# EAGLE board underground_cable_fault_finder (EAGLE 7.1.0)
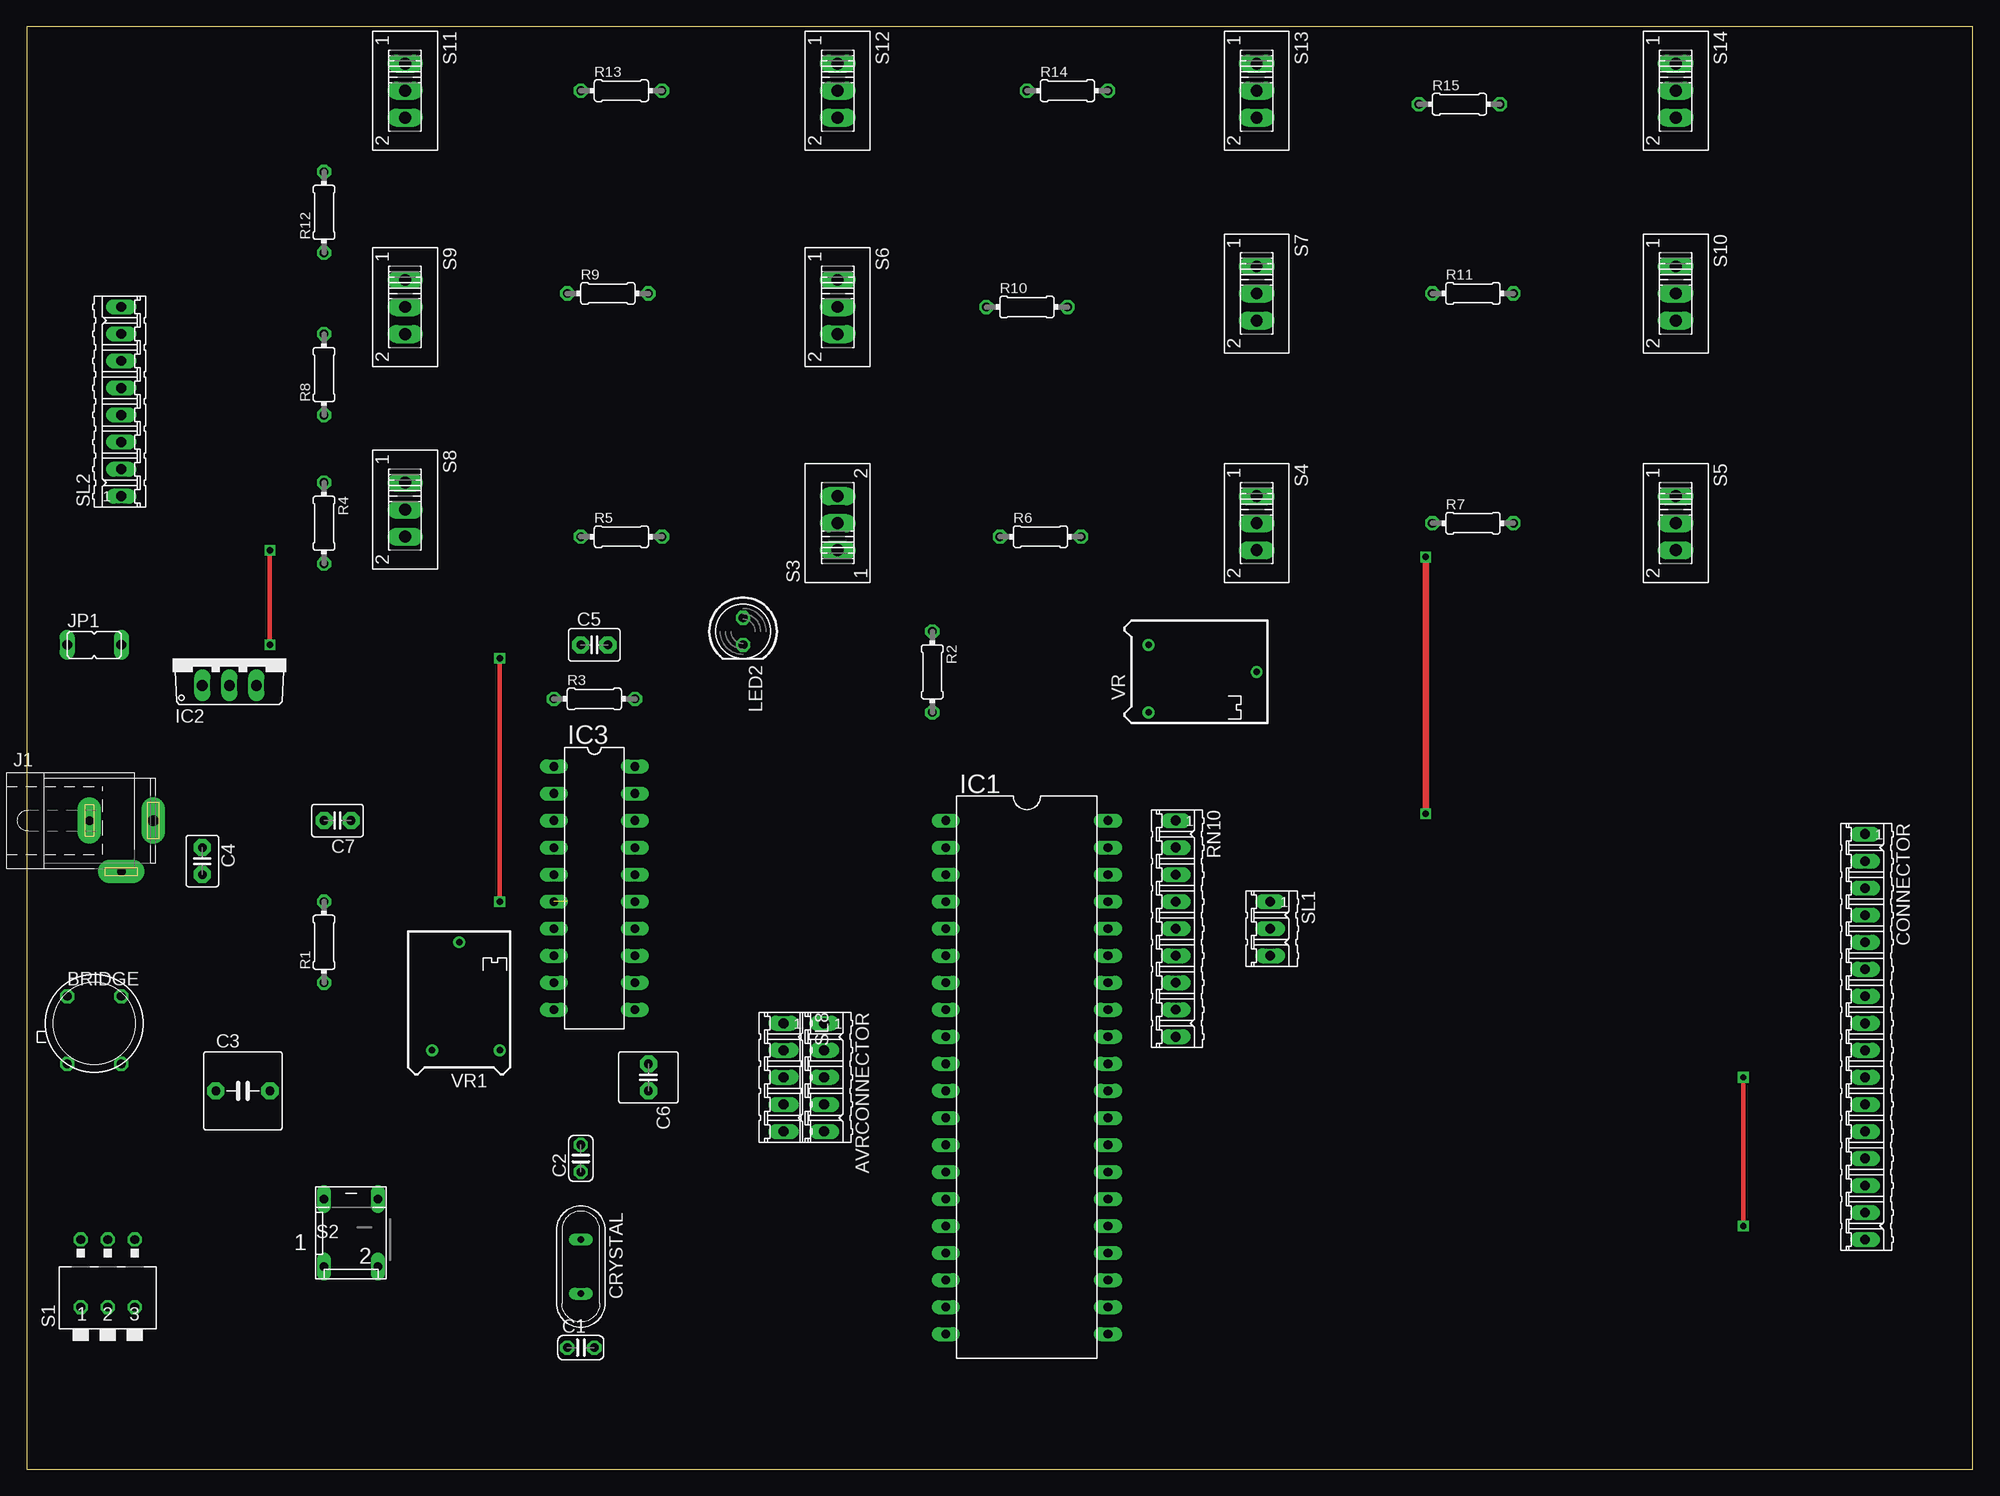
[diagram p0: board, top side]
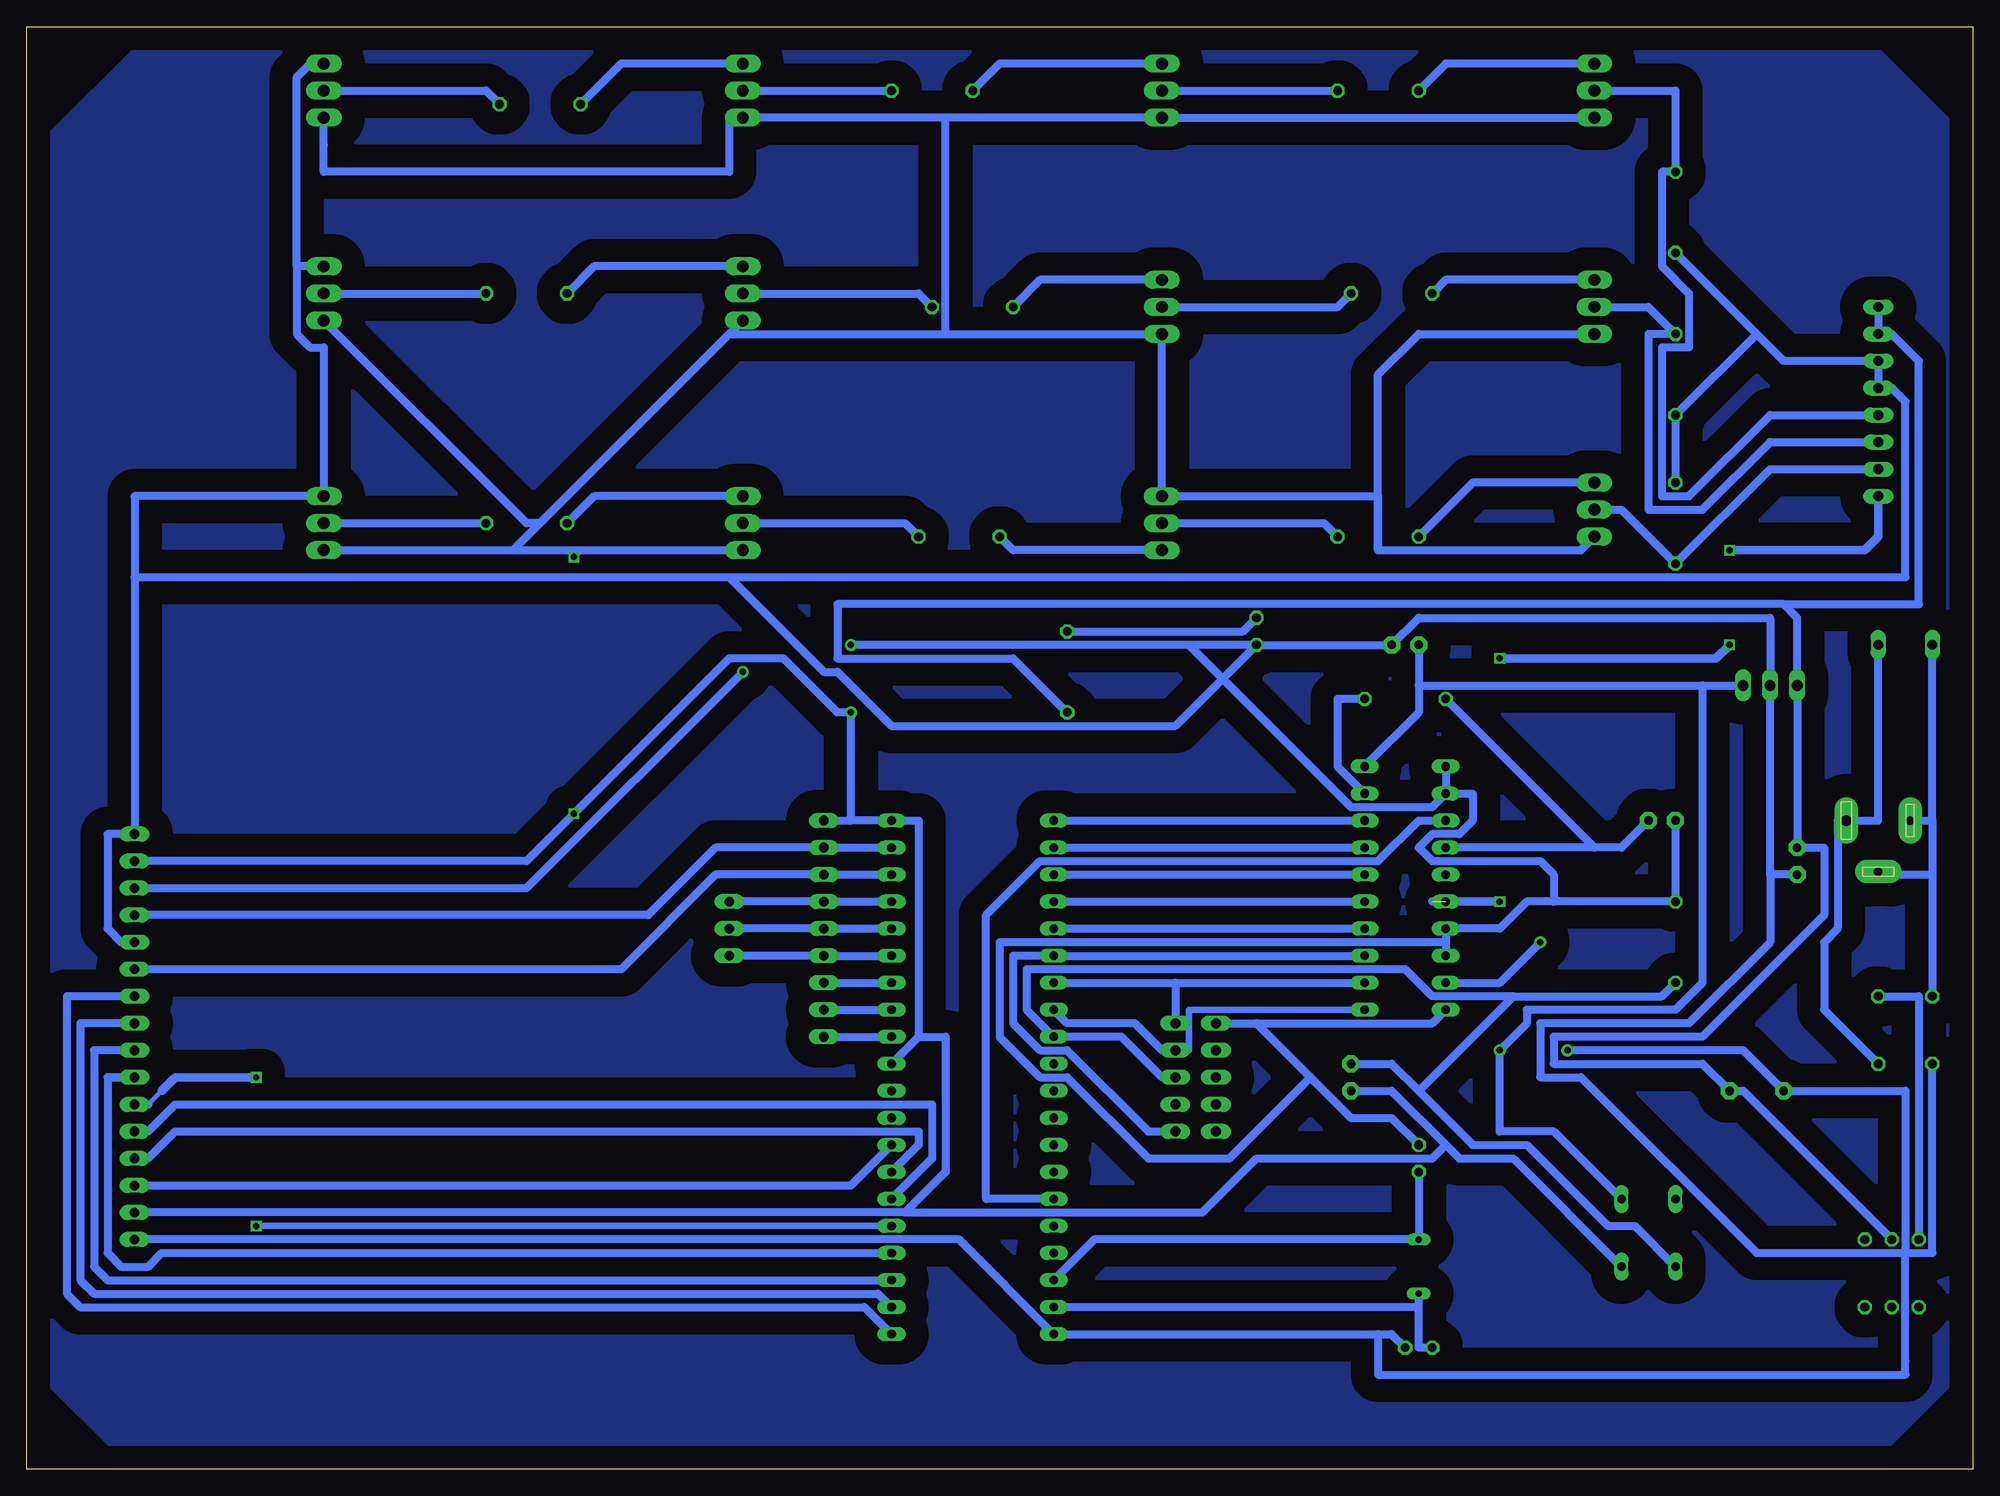
[diagram p1: board, bottom side, seen from below]

Size 182.86 x 135.56 mm. Coordinates in mm from the lower left corner, seen from the top.
Outline: 0,0 182.86,0 182.86,135.56 0,135.56 0,0
Copper layers (1*16): Top 0.035mm / dielectric 1.5mm / Bottom 0.035mm
Design rules "default": minimum track width 30mil, minimum drill 24mil, track to track 8mil, track to pad 8mil, pad to pad 8mil, via to via 8mil, smd to smd 8mil, copper to edge 40mil, drill to drill 8mil, minimum pad ring 10mil, minimum via ring 8mil, stop-mask expansion 4mil, vias tented up to drill 0mil, thermal gap 10mil

## Footprints (pad centres in the part's own frame; a part is rotated, then mirrored left to right if it is on the bottom)
05P = drill 0.914 long: 1 -5.08,0; 2 -2.54,0; 3 0,0; 4 2.54,0; 5 5.08,0
TO39/4 = drill 0.813 octagon: 1 -2.54,-2.54; 2 2.54,-2.54; 3 2.54,3.81; 4 -2.54,3.81
C025-024X044 = drill 0.813 octagon: 1 -1.27,0; 2 1.27,0
C5B7.2 = drill 0.813 pad 1.6 octagon: 1 -2.54,0; 2 2.54,0
C2.5-3 = drill 0.813 pad 1.6 octagon: 1 -1.27,0; 2 1.27,0
C2.5-6 = drill 0.813 pad 1.6 octagon: 1 -1.27,0; 2 1.27,0
16P = drill 0.914 long: 1 -19.05,0; 2 -16.51,0; 3 -13.97,0; 4 -11.43,0; 5 -8.89,0; 6 -6.35,0; 7 -3.81,0; 8 -1.27,0; 9 1.27,0; 10 3.81,0; 11 6.35,0; 12 8.89,0; 13 11.43,0; 14 13.97,0; 15 16.51,0; 16 19.05,0
QS = drill 0.61 long: 1 -2.54,0; 2 2.54,0
DIL40 = drill 0.813 long: 1 -24.13,-7.62; 2 -21.59,-7.62; 3 -19.05,-7.62; 4 -16.51,-7.62; 5 -13.97,-7.62; 6 -11.43,-7.62; 7 -8.89,-7.62; 8 -6.35,-7.62; 9 -3.81,-7.62; 10 -1.27,-7.62; 11 1.27,-7.62; 12 3.81,-7.62; 13 6.35,-7.62; 14 8.89,-7.62; 15 11.43,-7.62; 16 13.97,-7.62; 17 16.51,-7.62; 18 19.05,-7.62; 19 21.59,-7.62; 20 24.13,-7.62; 21 24.13,7.62; 22 21.59,7.62; 23 19.05,7.62; 24 16.51,7.62; 25 13.97,7.62; 26 11.43,7.62; 27 8.89,7.62; 28 6.35,7.62; 29 3.81,7.62; 30 1.27,7.62; 31 -1.27,7.62; 32 -3.81,7.62; 33 -6.35,7.62; 34 -8.89,7.62; 35 -11.43,7.62; 36 -13.97,7.62; 37 -16.51,7.62; 38 -19.05,7.62; 39 -21.59,7.62; 40 -24.13,7.62
TO220V = drill 1.016 long: 1 -2.54,-2.54; 2 0,-2.54; 3 2.54,-2.54
DIL20 = drill 0.813 long: 1 -11.43,-3.81; 2 -8.89,-3.81; 3 -6.35,-3.81; 4 -3.81,-3.81; 5 -1.27,-3.81; 6 1.27,-3.81; 7 3.81,-3.81; 8 6.35,-3.81; 9 8.89,-3.81; 10 11.43,-3.81; 11 11.43,3.81; 12 8.89,3.81; 13 6.35,3.81; 14 3.81,3.81; 15 1.27,3.81; 16 -1.27,3.81; 17 -3.81,3.81; 18 -6.35,3.81; 19 -8.89,3.81; 20 -11.43,3.81
SPC4077 = drill 0.8 pad 2.184 long: 1 -3,0; 2 0,-4.8 | drill 1 pad 2.184 long: 3 3,0
JP1 = drill 0.914 long: 1 0,-2.54; 2 0,2.54
LED5MM = drill 0.813 octagon: A -1.27,0; K 1.27,0
0204/7 = drill 0.813 octagon: 1 -3.81,0; 2 3.81,0
09P = drill 0.914 long: 1 -10.16,0; 2 -7.62,0; 3 -5.08,0; 4 -2.54,0; 5 0,0; 6 2.54,0; 7 5.08,0; 8 7.62,0; 9 10.16,0
DA-03 = drill 0.813 octagon: 1 -2.54,-5.08; 2 0,-5.08; 3 2.54,-5.08; 4 2.54,1.27; 5 0,1.27; 6 -2.54,1.27
DP-02 = drill 0.813 long: 1 -2.54,-2.54; 2 2.54,-2.54; 3 2.54,3.81; 4 -2.54,3.81
255SB = drill 1.118 long: 1 -2.54,0; 2 0,0; 3 2.54,0
03P = drill 0.914 long: 1 -2.54,0; 2 0,0; 3 2.54,0
08P = drill 0.914 long: 1 -8.89,0; 2 -6.35,0; 3 -3.81,0; 4 -1.27,0; 5 1.27,0; 6 3.81,0; 7 6.35,0; 8 8.89,0
RTRIM64P = drill 0.61: 1 -2.54,-3.81; 2 7.62,0; 3 -2.54,2.54

## Placement (x,y rotation side)
AVRCONNECTOR  [05P]  74.93,36.83 270 top
BRIDGE  [TO39/4]  6.35,40.64 0 top
C1  33pf  [C025-024X044]  52.07,11.43 0 top
C2  33pf  [C025-024X044]  52.07,29.21 90 top
C3  470uf  [C5B7.2]  20.32,35.56 0 top
C4  .01uf  [C2.5-3]  16.51,57.15 270 top
C5  4.7uf  [C2.5-3]  53.34,77.47 0 top
C6  0.1uf  [C2.5-6]  58.42,36.83 270 top
C7  150pf  [C2.5-3]  29.21,60.96 180 top
CONNECTOR  LCD  [16P]  172.72,40.64 270 top
CRYSTAL  11.0592 mhz  [QS]  52.07,19.05 270 top
IC1  AT89S51  [DIL40]  93.98,36.83 270 top
IC2  7805TV  [TO220V]  19.05,76.2 0 top
IC3  adc804  [DIL20]  53.34,54.61 270 top
J1  [SPC4077]  8.89,60.96 0 top
JP1  TRANSFORMER  [JP1]  6.35,77.47 270 top
LED2  5mm  [LED5MM]  67.31,78.74 270 top
R1  10k  [0204/7]  27.94,49.53 90 top
R2  560E  [0204/7]  85.09,74.93 270 top
R3  10k  [0204/7]  53.34,72.39 0 top
R4  10k  [0204/7]  27.94,88.9 270 top
R5  10k  [0204/7]  55.88,87.63 0 top
R6  10k  [0204/7]  95.25,87.63 0 top
R7  10k  [0204/7]  135.89,88.9 0 top
R8  10k  [0204/7]  27.94,102.87 90 top
R9  10k  [0204/7]  54.61,110.49 0 top
R10  10k  [0204/7]  93.98,109.22 0 top
R11  10k  [0204/7]  135.89,110.49 0 top
R12  10k  [0204/7]  27.94,118.11 90 top
R13  10k  [0204/7]  55.88,129.54 0 top
R14  10k  [0204/7]  97.79,129.54 0 top
R15  10k  [0204/7]  134.62,128.27 0 top
RN10  10 k  [09P]  107.95,50.8 270 top
S1  ON/ OFF SWITCH  [DA-03]  7.62,20.32 0 top
S2  push switch  [DP-02]  30.48,21.59 0 top
S3  [255SB]  76.2,88.9 90 top
S4  [255SB]  115.57,88.9 270 top
S5  [255SB]  154.94,88.9 270 top
S6  [255SB]  76.2,109.22 270 top
S7  [255SB]  115.57,110.49 270 top
S8  [255SB]  35.56,90.17 270 top
S9  [255SB]  35.56,109.22 270 top
S10  [255SB]  154.94,110.49 270 top
S11  [255SB]  35.56,129.54 270 top
S12  [255SB]  76.2,129.54 270 top
S13  [255SB]  115.57,129.54 270 top
S14  [255SB]  154.94,129.54 270 top
SL1  [03P]  116.84,50.8 270 top
SL2  [08P]  8.89,100.33 90 top
SL8  [05P]  71.12,36.83 270 top
VR  10k  [RTRIM64P]  107.95,74.93 0 top
VR1  10k  [RTRIM64P]  40.64,41.91 90 top

## Library data of the parts
AVRCONNECTOR CONNECTOR RN10 SL1 SL2 SL8 = con-amp-quick; OC_FARNELL: unknown; OC_NEWARK: unknown
BRIDGE IC2 = linear
C1 C2 = rcl
C3-C7 = capacitor-wima
CRYSTAL = special
IC1 = atmel; OC_FARNELL: unknown; OC_NEWARK: unknown
IC3 = atmel; MPN: ATF16V8CZ-15PU; OC_FARNELL: 1551768; OC_NEWARK: 94M6254
J1 = con-jack; OC_FARNELL: unknown; OC_NEWARK: unknown
JP1 = jumper
LED2 = led
R1-R15 = eagle-ltspice; SPICEMODEL: NONE; SPICEPREFIX: R
S1 = switch-dil; MPN: MCDA03; OC_FARNELL: 1521999; OC_NEWARK: 74M2972
S2 = switch-dil; MPN: MCDP02; OC_FARNELL: 1255233; OC_NEWARK: 26M1095
S3-S14 = switch
VR VR1 = resistor

## Nets
N$1: C2.1 CRYSTAL.1 IC1.18
N$2: C1.1 CRYSTAL.2 IC1.19
N$3: BRIDGE.1 C1.2 C2.2 C3.1 C4.2 C5.2 C7.2 CONNECTOR.1 CONNECTOR.5 CONNECTOR.16 IC1.20 IC2.2 IC3.1 IC3.2 IC3.7 IC3.8 IC3.10 LED2.K R1.2 R4.1 R8.1 R12.1 S5.1 S10.1 S14.1 SL2.5 SL2.6 SL8.1 VR1.3 VR.3
N$5: BRIDGE.2 J1.3 JP1.2
N$6: IC1.1 IC3.18
N$7: IC1.2 IC3.17
N$8: IC1.3 IC3.16
N$9: IC1.4 IC3.15
N$10: IC1.5 IC3.14
N$11: AVRCONNECTOR.5 IC1.6 IC3.13
N$12: AVRCONNECTOR.1 IC1.7 IC3.12
N$14: AVRCONNECTOR.3 C6.1 IC1.9 R1.1 S2.1
N$16: BRIDGE.4 J1.1 J1.2 JP1.1
N$17: IC3.19 R3.2
N$18: C7.1 IC3.4 R3.1
N$19: R4.2 S8.2 SL2.2
N$20: C6.2 CONNECTOR.2 CONNECTOR.15 IC1.31 IC1.40 RN10.1 S2.2 S3.3 S4.3 S5.3 S6.3 S7.3 S8.3 S9.3 S10.3 S11.3 S12.3 S13.3 S14.3 VR.1
N$21: R8.2 S9.2 SL2.3
N$22: R5.2 S3.2
N$23: IC3.9 VR1.2
N$25: IC1.36 RN10.5 SL1.2
N$26: IC1.15 IC3.3
N$27: IC1.34 RN10.7
N$28: IC1.33 RN10.8
N$29: IC1.32 RN10.9
N$30: CONNECTOR.7 IC1.21
N$31: CONNECTOR.8 IC1.22
N$32: CONNECTOR.9 IC1.23
N$33: R5.1 S8.1
N$34: R6.2 S4.2
N$35: CONNECTOR.12 IC1.26
N$36: R6.1 S3.1
N$37: R7.2 S5.2
N$38: CONNECTOR.3 VR.2
N$39: IC3.6 SL2.1
N$40: R9.1 S9.1
N$42: R9.2 S6.2
N$43: LED2.A R2.1
N$44: R10.1 S6.1
N$45: AVRCONNECTOR.2 IC1.8 IC3.11
N$47: BRIDGE.3 S1.6
N$48: CONNECTOR.6 IC1.38 RN10.3
N$49: R10.2 S7.2
N$50: R11.1 S7.1
N$51: CONNECTOR.10 IC1.24
N$52: CONNECTOR.11 IC1.25
N$53: R11.2 S10.2
N$54: CONNECTOR.13 IC1.27
N$55: CONNECTOR.14 IC1.28
N$57: C5.1 IC2.3 IC3.20 S2.3 VR1.1
N$58: CONNECTOR.4 IC1.39 RN10.2
N$59: R13.2 S12.2
N$60: R14.2 S13.2
N$61: R15.2 S14.2
N$62: R13.1 S11.1
N$63: R14.1 S12.1
N$64: R15.1 S13.1
N$71: C3.2 C4.1 IC2.1 R2.2 S1.5 SL2.7 SL2.8
N$74: IC1.37 RN10.4 SL1.1
N$76: R12.2 S11.2 SL2.4
N$83: IC1.35 RN10.6 SL1.3
N$84: R7.1 S4.1

## Tracks (layer width: path | path; a pad name or v marks a point on that pad's centre or on a via)
N$1
  Bottom 0.762: C2.1 CRYSTAL.1 82.55,21.59 IC1.18
N$2
  Bottom 0.762: 52.07,15.24 52.07,11.43 C1.1 | 52.07,15.24 CRYSTAL.2 | 52.07,15.24 IC1.19
N$3
  Bottom 0.762: VR1.3 21.59,39.37 C3.1 6.35,35.56 6.35,20.32 | BRIDGE.1 3.81,20.32 6.35,20.32 | C1.2 54.61,12.7 55.88,12.7 | 55.88,12.7 IC1.20 95.25,21.59 CONNECTOR.16 | 6.35,20.32 6.35,10.16 6.35,8.89 55.88,8.89 55.88,12.7 | IC3.10 50.8,41.91 67.31,41.91 | SL8.1 67.31,41.91 | C2.2 54.61,33.02 58.42,33.02 62.23,36.83 | 67.31,41.91 62.23,36.83 | 49.53,49.53 IC3.7 44.45,50.8 41.91,53.34 39.37,53.34 | 49.53,49.53 IC3.8 | C7.2 R1.2 39.37,53.34 | 62.23,36.83 69.85,29.21 77.47,29.21 85.09,36.83 87.63,36.83 91.44,40.64 91.44,49.53 49.53,49.53 | 19.05,55.88 IC2.2 19.05,80.01 52.07,80.01 C5.2 LED2.K | C4.2 19.05,55.88 | IC3.1 IC3.2 | LED2.K 73.66,77.47 | 73.66,77.47 VR.3 | IC3.2 50.8,62.23 58.42,62.23 73.66,77.47 | 39.37,53.34 39.37,55.88 40.64,57.15 46.99,57.15 50.8,57.15 52.07,58.42 50.8,59.69 48.26,59.69 46.99,60.96 46.99,63.5 IC3.2 | R4.1 R8.1 20.32,106.68 | 20.32,106.68 17.78,104.14 SL2.6 SL2.5 7.62,101.6 6.35,100.33 6.35,83.82 116.84,83.82 | 20.32,106.68 R12.1 | CONNECTOR.5 173.99,49.53 175.26,50.8 175.26,59.69 CONNECTOR.1 172.72,83.82 | 157.48,113.03 157.48,106.68 156.21,105.41 154.94,105.41 S5.1 172.72,91.44 172.72,83.82 | S10.1 157.48,113.03 | S14.1 156.21,132.08 157.48,130.81 157.48,113.03 | 172.72,83.82 116.84,83.82 | LED2.K 74.93,69.85 101.6,69.85 106.68,74.93 107.95,74.93 116.84,83.82 | 6.35,20.32 20.32,20.32 36.83,36.83 40.64,36.83 40.64,41.91 26.67,41.91 19.05,49.53 19.05,55.88
N$4
  pour Bottom (isolate 2.184): 12.7,0 10.16,0 0,10.16 0,124.46 11.43,135.89 170.18,135.89 182.88,123.19 182.88,10.16 172.72,0
N$5
  Bottom 0.762: BRIDGE.2 13.97,43.18 13.97,49.53 12.7,50.8 12.7,60.96 J1.3 11.43,60.96 8.89,60.96 JP1.2
N$6
  Bottom 0.762: IC1.1 IC3.18
N$7
  Bottom 0.762: IC1.2 IC3.17
N$8
  Bottom 0.762: IC1.3 IC3.16
N$9
  Bottom 0.762: IC1.4 IC3.15
N$10
  Bottom 0.762: IC1.5 IC3.14
N$11
  Bottom 0.762: IC3.13 IC1.6 90.17,48.26 90.17,41.91 87.63,39.37 85.09,39.37 77.47,31.75 AVRCONNECTOR.5
N$12
  Bottom 0.762: IC1.7 74.93,45.72 | 74.93,45.72 IC3.12 | 74.93,45.72 AVRCONNECTOR.1
N$14
  Bottom 0.762: AVRCONNECTOR.3 76.2,36.83 80.01,40.64 IC1.9 88.9,43.18 88.9,46.99 53.34,46.99 50.8,44.45 43.18,44.45 | S2.1 31.75,22.86 34.29,22.86 41.91,30.48 46.99,30.48 52.07,35.56 | 52.07,35.56 54.61,38.1 C6.1 | R1.1 29.21,44.45 43.18,44.45 | 52.07,35.56 43.18,44.45
N$16
  Bottom 0.762: 3.81,55.88 BRIDGE.4 | 3.81,55.88 8.89,55.88 J1.2 | 3.81,60.96 JP1.1 | 3.81,60.96 5.08,60.96 J1.1 | 3.81,60.96 3.81,55.88
N$17
  Bottom 0.762: IC3.19 59.69,66.04 59.69,72.39 R3.2
N$18
  Bottom 0.762: 35.56,58.42 33.02,58.42 C7.1 | 35.56,58.42 IC3.4 | 35.56,58.42 R3.1
N$19
  Bottom 0.762: S8.2 33.02,90.17 R4.2 19.05,93.98 SL2.2
N$20  (via drill 0.6)
  Top 0.61: v131.44,85.72 v131.44,61.59
  Bottom 0.61: S4.3 130.81,86.36 v131.44,85.72
  Bottom 0.762: S11.3 S12.3 96.52,127 | 96.52,127 S13.3 116.84,127 116.84,121.92 154.94,121.92 154.94,124.46 S14.3 | S8.3 36.83,86.36 55.88,86.36 | 55.88,86.36 55.88,91.44 60.96,91.44 S3.3 S6.3 96.52,106.68 | 55.88,86.36 55.88,102.87 52.07,106.68 S9.3 | S5.3 137.16,86.36 | 137.16,86.36 130.81,86.36 S4.3 | 137.16,86.36 134.62,88.9 | 134.62,88.9 116.84,106.68 | 116.84,106.68 S7.3 | S10.3 135.89,88.9 134.62,88.9 | 116.84,106.68 96.52,106.68 | 96.52,106.68 96.52,127 | 105.41,60.96 VR.1 106.68,71.12 111.76,76.2 116.84,76.2 v131.44,61.59 135.89,57.15 CONNECTOR.2 | RN10.1 105.41,60.96 | S2.2 43.18,29.21 48.26,29.21 49.53,30.48 | 49.53,30.48 54.61,35.56 C6.2 | 99.06,40.64 IC1.31 | 99.06,40.64 99.06,60.96 IC1.40 105.41,60.96 | 100.33,24.13 CONNECTOR.15 | 100.33,24.13 96.52,27.94 96.52,40.64 99.06,40.64 | 49.53,30.48 50.8,29.21 67.31,29.21 72.39,24.13 100.33,24.13
N$21
  Bottom 0.762: S9.2 30.48,109.22 R8.2 30.48,106.68 30.48,90.17 25.4,90.17 19.05,96.52 SL2.3
N$22
  Bottom 0.762: R5.2 60.96,88.9 S3.2
N$23
  Bottom 0.762: VR1.2 44.45,45.72 IC3.9
N$25
  Bottom 0.762: IC1.36 RN10.5 SL1.2
N$26
  Bottom 0.762: IC3.3 52.07,60.96 55.88,57.15 87.63,57.15 92.71,52.07 92.71,25.4 IC1.15
N$27
  Bottom 0.762: RN10.7 IC1.34
N$28
  Bottom 0.762: RN10.8 IC1.33
N$29
  Bottom 0.762: RN10.9 IC1.32
N$30
  Bottom 0.762: IC1.21 104.14,15.24 177.8,15.24 179.07,16.51 179.07,44.45 CONNECTOR.7
N$31
  Bottom 0.762: IC1.22 102.87,16.51 176.53,16.51 177.8,17.78 177.8,41.91 CONNECTOR.8
N$32
  Bottom 0.762: IC1.23 175.26,17.78 176.53,19.05 176.53,39.37 CONNECTOR.9
N$33
  Bottom 0.762: R5.1 46.99,92.71 S8.1
N$34
  Bottom 0.762: R6.2 100.33,88.9 S4.2
N$35
  Bottom 0.762: IC1.26 97.79,29.21 97.79,34.29 168.91,34.29 171.45,31.75 CONNECTOR.12
N$36
  Bottom 0.762: R6.1 90.17,86.36 S3.1
N$37
  Bottom 0.762: S5.2 R7.2
N$38
  Bottom 0.762: VR.2 135.89,54.61 CONNECTOR.3
N$39  (via drill 0.6)  (1 unrouted)
  Top 0.406: v22.86,86.36 v22.86,77.47 | v44.45,76.2 v44.45,53.34
  Bottom 0.813: SL2.1 8.89,87.63 10.16,86.36 13.97,86.36 v22.86,86.36 | v22.86,77.47 24.13,76.2 43.18,76.2 v44.45,76.2 | v44.45,53.34 50.8,53.34
N$40
  Bottom 0.762: R9.1 49.53,111.76 S9.1
N$42
  Bottom 0.762: R9.2 59.69,109.22 S6.2
N$43
  Bottom 0.762: LED2.A 68.58,78.74 R2.1
N$44
  Bottom 0.762: R10.1 87.63,111.76 S6.1
N$45
  Bottom 0.61: IC3.11 73.66,43.18 73.66,39.37 76.2,39.37
  Bottom 0.762: IC1.8 85.09,41.91 78.74,41.91 76.2,39.37 AVRCONNECTOR.2
N$47
  Bottom 0.762: S1.6 5.08,44.45 BRIDGE.3
N$48
  Bottom 0.762: IC1.38 RN10.3 118.11,55.88 127,46.99 CONNECTOR.6
N$49
  Bottom 0.762: R10.2 99.06,110.49 S7.2
N$50
  Bottom 0.762: R11.1 129.54,113.03 S7.1
N$51
  Bottom 0.762: IC1.24 170.18,20.32 171.45,19.05 173.99,19.05 175.26,20.32 175.26,36.83
  Bottom 0.813: CONNECTOR.10 175.26,36.83
N$52  (via drill 0.6)
  Top 0.406: v161.29,22.86 v161.29,36.83
  Bottom 0.406: 170.18,35.56 171.45,34.29
  Bottom 0.61: IC1.25 v161.29,22.86
  Bottom 0.813: v161.29,36.83 168.91,36.83 170.18,35.56 | 171.45,34.29 CONNECTOR.11
N$53
  Bottom 0.762: S10.2 R11.2
N$54
  Bottom 0.762: IC1.27 99.06,30.48 99.06,31.75 168.91,31.75 171.45,29.21 CONNECTOR.13
N$55
  Bottom 0.762: IC1.28 105.41,26.67 CONNECTOR.14
N$57
  Bottom 0.762: S2.3 39.37,31.75 44.45,31.75 VR1.1 41.91,41.91 41.91,43.18 27.94,43.18 25.4,45.72 25.4,73.66 | IC3.20 52.07,71.12 52.07,73.66 | C5.1 52.07,73.66 | 52.07,73.66 25.4,73.66 | 25.4,73.66 IC2.3
N$58
  Bottom 0.762: IC1.39 RN10.2 118.11,58.42 124.46,52.07 CONNECTOR.4
N$59
  Bottom 0.762: S12.2 R13.2
N$60
  Bottom 0.762: S13.2 R14.2
N$61
  Bottom 0.762: R15.2 139.7,129.54 S14.2
N$62
  Bottom 0.762: R13.1 49.53,132.08 S11.1
N$63
  Bottom 0.762: R14.1 91.44,132.08 S12.1
N$64
  Bottom 0.762: R15.1 127,132.08 S13.1
N$71
  Bottom 0.762: S1.5 21.59,35.56 C3.2 25.4,38.1 39.37,38.1 39.37,40.64 25.4,40.64 13.97,52.07 13.97,58.42 C4.1 IC2.1 16.51,80.01 17.78,81.28 | SL2.8 SL2.7 7.62,106.68 5.08,104.14 5.08,81.28 17.78,81.28 | R2.2 90.17,76.2 106.68,76.2 106.68,81.28 17.78,81.28
N$74
  Bottom 0.762: IC1.37 RN10.4 SL1.1
N$76
  Bottom 0.762: S11.2 27.94,129.54 R12.2 29.21,121.92 29.21,113.03 26.67,110.49 26.67,105.41 29.21,105.41 29.21,91.44 26.67,91.44 19.05,99.06 SL2.4
N$83
  Bottom 0.762: IC1.35 RN10.6 SL1.3
N$84
  Bottom 0.762: R7.1 129.54,91.44 S4.1